# EAGLE board axiom_beta_imu_cso_v0.1_r1.1-default.265cd33e (EAGLE 7.7.0)
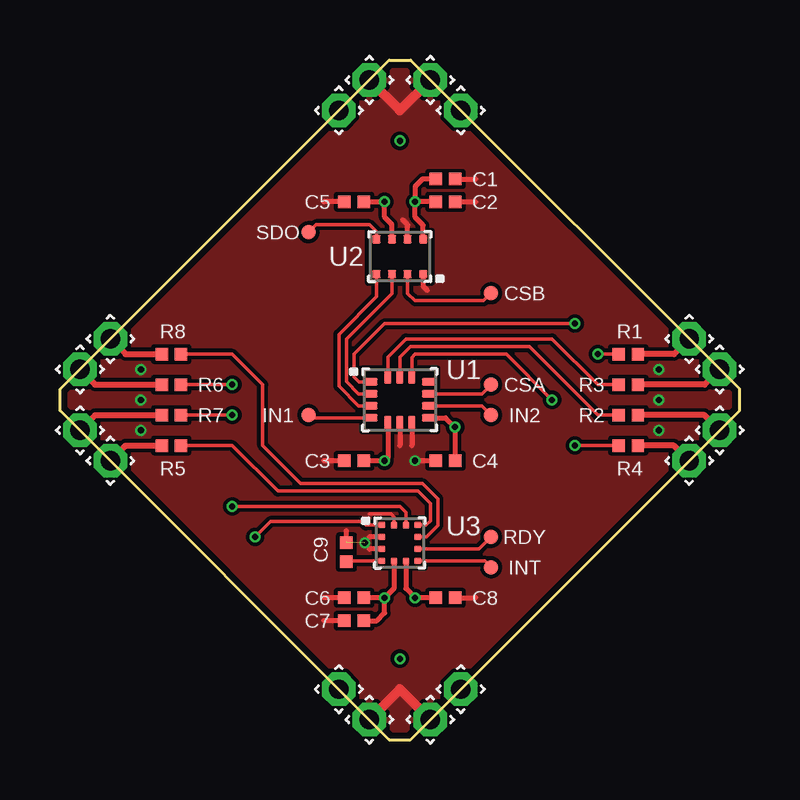
[diagram p0: board, top side]
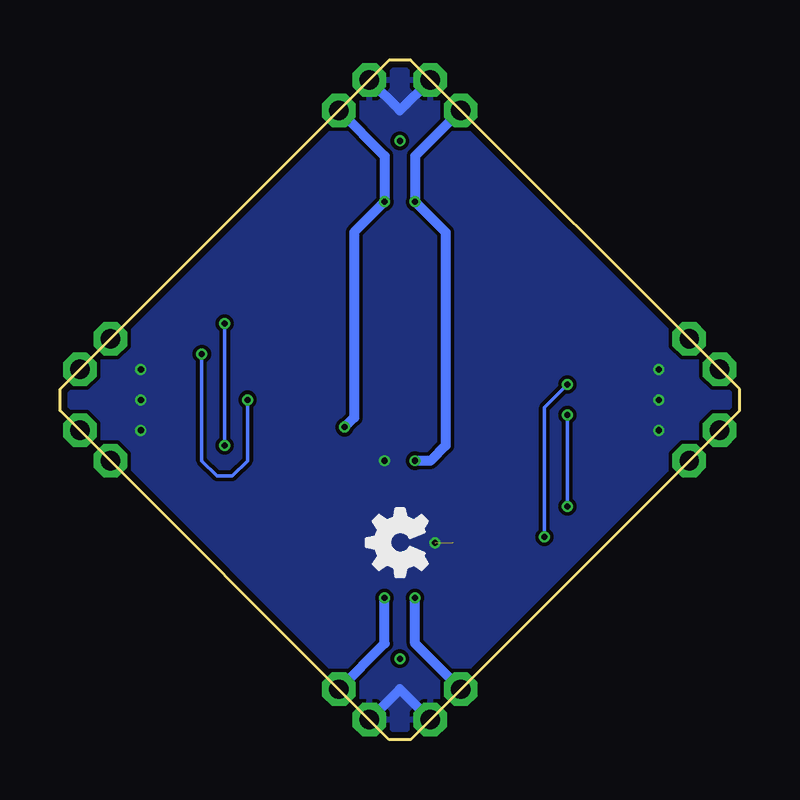
[diagram p1: board, bottom side, seen from below]

Size 28.34 x 28.34 mm. Coordinates in mm from the lower left corner, seen from the top.
Outline: 0,13.72 13.72,0 14.62,0 28.34,13.72 28.34,14.62 14.62,28.34 13.72,28.34 0,14.62 0,13.72
Copper layers (1*16): Top 0.035559375mm / dielectric 0.17018125mm / Bottom 0.035559375mm
Design rules "OSHPark-4layer-tuned *": minimum track width 5mil, minimum drill 10mil, track to track 6mil, track to pad 5mil, pad to pad 5mil, via to via 5mil, smd to smd 5mil, copper to edge 10mil, drill to drill 6mil, minimum pad ring 4mil, minimum via ring 4mil, stop-mask expansion 2mil, vias tented up to drill 100mil, thermal gap 6mil
Net classes: 0 default: width 0.152 mm, drill 0.254 mm; 1 power: width 0.152 mm, drill 0.254 mm

## Footprints (pad centres in the part's own frame; a part is rotated, then mirrored left to right if it is on the bottom)
0402-C = smd 0.52 x 0.52: 1 -0.4,0; 2 0.4,0
TP06R = smd 0.6 x 0.6: TP 0,0
LGA-14L = smd 0.55 x 0.3: 1 -1.2,0.75; 2 -1.2,0.25; 3 -1.2,-0.25; 4 -1.2,-0.75; 8 1.2,-0.75; 9 1.2,-0.25; 10 1.2,0.25; 11 1.2,0.75 | smd 0.3 x 0.55: 5 -0.5,-0.95; 6 0,-0.95; 7 0.5,-0.95; 12 0.5,0.95; 13 0,0.95; 14 -0.5,0.95
VLGA-8 = smd 0.35 x 0.35: 1 -0.975,0.725; 2 -0.325,0.725; 3 0.325,0.725; 4 0.975,0.725; 5 0.975,-0.725; 6 0.325,-0.725; 7 -0.325,-0.725; 8 -0.975,-0.725
VFLGA-12 = smd 0.3 x 0.28: 1 -0.75,0.75; 2 -0.75,0.25; 3 -0.75,-0.25; 4 -0.75,-0.75; 7 0.75,-0.75; 8 0.75,-0.25; 9 0.75,0.25; 10 0.75,0.75 | smd 0.28 x 0.3: 5 -0.25,-0.75; 6 0.25,-0.75; 11 0.25,0.75; 12 -0.25,0.75
1.4/0.8 = drill 0.8 pad 1.4 octagon: 1 0,0

## Placement (x,y rotation side)
C1  1u  [0402-C]  16.07,23.38 0 top
C2  100n  [0402-C]  16.07,22.42 0 top
C3  100n  [0402-C]  12.26,11.63 180 top
C4  100n  [0402-C]  16.07,11.63 180 top
C5  100n  [0402-C]  12.26,22.42 180 top
C6  100n  [0402-C]  12.26,5.91 180 top
C7  1u  [0402-C]  12.26,4.96 180 top
C8  100n  [0402-C]  16.07,5.91 0 top
C9  100n  [0402-C]  11.95,7.82 90 top
CSA  TPTP06R  [TP06R]  17.98,14.8 0 top
CSB  TPTP06R  [TP06R]  17.98,18.61 0 top
IN1  TPTP06R  [TP06R]  10.36,13.53 0 top
IN2  TPTP06R  [TP06R]  17.98,13.53 0 top
INT  TPTP06R  [TP06R]  17.98,7.18 0 top
LOGO1  OSHW_LOGO_FILLX0100-NT  [OSHW_FILLX100_NOTEXT]  13.03,6.8 90 bottom
R1  [0402-C]  23.69,16.07 180 top
R2  [0402-C]  23.69,13.53 180 top
R3  [0402-C]  23.69,14.8 180 top
R4  [0402-C]  23.69,12.26 180 top
R5  [0402-C]  4.64,12.26 0 top
R6  [0402-C]  4.64,14.8 0 top
R7  [0402-C]  4.64,13.53 0 top
R8  [0402-C]  4.64,16.07 0 top
RDY  TPTP06R  [TP06R]  17.98,8.45 0 top
SDO  TPTP06R  [TP06R]  10.36,21.15 0 top
U1  LSM6DS3H  [LGA-14L]  14.17,14.17 0 top
U2  DPS310  [VLGA-8]  14.17,20.14 180 top
U3  LIS3MDL  [VFLGA-12]  14.17,8.2 0 top
U$1  PINPAD2.00MM  [1.4/0.8]  12.9,27.5 45 top
U$2  PINPAD2.00MM  [1.4/0.8]  15.44,27.5 45 top
U$3  PINPAD2.00MM  [1.4/0.8]  11.63,26.23 45 top
U$4  PINPAD2.00MM  [1.4/0.8]  16.71,26.23 45 top
U$5  PINPAD2.00MM  [1.4/0.8]  2.1,16.71 45 top
U$6  PINPAD2.00MM  [1.4/0.8]  26.23,16.71 45 top
U$7  PINPAD2.00MM  [1.4/0.8]  0.83,15.44 45 top
U$8  PINPAD2.00MM  [1.4/0.8]  27.5,15.44 45 top
U$9  PINPAD2.00MM  [1.4/0.8]  0.83,12.9 45 top
U$10  PINPAD2.00MM  [1.4/0.8]  27.5,12.9 45 top
U$11  PINPAD2.00MM  [1.4/0.8]  2.1,11.63 225 top
U$12  PINPAD2.00MM  [1.4/0.8]  26.23,11.63 45 top
U$13  PINPAD2.00MM  [1.4/0.8]  11.63,2.1 45 top
U$14  PINPAD2.00MM  [1.4/0.8]  16.71,2.1 45 top
U$15  PINPAD2.00MM  [1.4/0.8]  12.9,0.83 45 top
U$16  PINPAD2.00MM  [1.4/0.8]  15.44,0.83 45 top

## Library data of the parts
C1-C9 R1-R8 = generic-rcl
CSA CSB IN1 IN2 INT RDY SDO = testpad
LOGO1 = ohw-logo
U1 = iNEMO
U2 = dps310
U3 = lis3mdl
U$1-U$16 = pinpad

## Nets
C_CK_E: R2.1 U$10.1
C_CK_W: R6.1 U$7.1
C_EN_E: R1.1 U$6.1
C_EN_W: R5.1 U$11.1
C_SI_E: R3.1 U$8.1
C_SI_W: R7.1 U$9.1
C_SO_E: R4.1 U$12.1
C_SO_W: R8.1 U$5.1
CSO_NE_V [power]: C1.1 C2.1 C4.1 U1.8 U2.8 U$4.1
CSO_NW_V: C3.1 C5.1 U1.5 U2.6 U$3.1
CSO_SE_V: C8.1 U3.6 U$14.1
CSO_SW_V [power]: C6.1 C7.1 U3.5 U$13.1
GND: C1.2 C2.2 C3.2 C4.2 C5.2 C6.2 C7.2 C8.2 C9.2 U1.6 U1.7 U2.1 U2.7 U3.2 U3.3 U3.12 U$1.1 U$2.1 U$15.1 U$16.1
N$5: U1.3 U2.4
N$6: U1.2 U2.3
N$7: IN2.TP U1.9
N$8: CSA.TP U1.10
N$9: IN1.TP U1.4
N$10: SDO.TP U2.5
N$11: CSB.TP U2.2
N$12: INT.TP U3.7
N$13: RDY.TP U3.8
N$18: C9.1 U3.4
N_CS: R1.2 U1.12
N_SDI: R3.2 U1.14
N_SDO: R4.2 U1.1
N_SPC: R2.2 U1.13
S_CS: R5.2 U3.10
S_SDI: R7.2 U3.11
S_SDO: R8.2 U3.9
S_SPC: R6.2 U3.1

## Tracks (layer width: path | path; a pad name or v marks a point on that pad's centre or on a via)
C_CK_E
  Top 0.254: U$10.1 26.87,13.53 R2.1
C_CK_W
  Top 0.254: U$7.1 1.47,14.8 R6.1
C_EN_E
  Top 0.254: U$6.1 25.6,16.07 R1.1
C_EN_W
  Top 0.254: U$11.1 2.74,12.26 R5.1
C_SI_E
  Top 0.254: U$8.1 26.87,14.8 R3.1
C_SI_W
  Top 0.254: U$9.1 1.47,13.53 R7.1
C_SO_E
  Top 0.254: U$12.1 25.6,12.26 R4.1
C_SO_W
  Top 0.254: U$5.1 2.74,16.07 R8.1
CSO_NE_V  (via drill 0.25)
  Top 0.203: U1.8 16.08,13.42 v16.47,13.03 C4.1 | C2.1 v14.8,22.42 | U2.8 15.14,21.45 14.8,21.79 v14.8,22.42 | C1.1 15.12,23.38 14.8,23.06 v14.8,22.42
  Bottom 0.406: U$4.1 14.8,24.33 v14.8,22.42 16.07,21.15 16.07,13.43 v16.47,13.03
CSO_NW_V  (via drill 0.25)
  Top 0.203: U1.5 13.67,11.76 v13.53,11.63 C3.1 | C5.1 v13.53,22.42 13.53,21.79 13.84,21.48 U2.6
  Bottom 0.406: U$3.1 13.53,24.33 v13.53,22.42 12.26,21.15 12.26,12.26 12.9,11.63 v13.53,11.63
CSO_SE_V  (via drill 0.25)
  Top 0.203: U3.6 14.42,6.3 v14.8,5.91 C8.1
  Bottom 0.406: U$14.1 14.8,4.01 v14.8,5.91
CSO_SW_V  (via drill 0.25)
  Top 0.203: U3.5 13.92,6.3 v13.53,5.91 | v13.53,5.91 C6.1 | C7.1 13.22,4.96 13.53,5.28 v13.53,5.91
  Bottom 0.406: U$13.1 13.53,4.01 v13.53,5.91
GND  (via drill 0.25)  (1 unrouted)
  Top 0.152: 12.9,9.42 13.79,9.42 13.92,9.29 U3.12
  Top 0.203: C9.2 11.95,8.71 | C3.2 10.99,11.63 | C4.2 v14.8,11.63 | C6.2 10.99,5.91 | C7.2 10.99,4.96 | C8.2 17.34,5.91 | C2.2 17.34,22.42 | C1.2 17.34,23.38 | C5.2 10.99,22.42 | U3.2 12.9,8.45 | U3.3 12.9,7.95 | U1.6 14.17,12.26 | U1.7 14.67,12.26 | U2.7 14.49,21.46 14.3,21.66 | U2.1 15.14,18.91 15.31,18.74
  Top 0.406: U$15.1 14.17,2.1 U$16.1 | U$2.1 14.17,26.23 U$1.1
  Bottom 0.406: U$16.1 14.17,2.1 U$15.1 | U$1.1 14.17,26.23 U$2.1
  other vias: 24.96,15.44 24.96,14.17 24.96,12.9 3.37,15.44 3.37,14.17 3.37,12.9 12.71,8.2
  pour Top: -0.44,14.17 14.17,28.77 28.77,14.17 14.17,-0.44
  pour Bottom: -0.44,14.17 14.17,28.77 28.77,14.17 14.17,-0.44
N$1
  cutout Top: 11.45,5.63 11.45,6.19 arc-90 11.58,6.32 12.95,6.32 arc-90 13.08,6.19 13.08,5.63 arc-90 12.95,5.51 11.58,5.51 arc-90
  cutout Top: 11.45,4.68 11.45,5.24 arc-90 11.58,5.37 12.95,5.37 arc-90 13.08,5.24 13.08,4.68 arc-90 12.95,4.55 11.58,4.55 arc-90
  cutout Top: 15.26,5.63 15.26,6.19 arc-90 15.39,6.32 16.76,6.32 arc-90 16.89,6.19 16.89,5.63 arc-90 16.76,5.51 15.39,5.51 arc-90
  cutout Top: 15.26,11.35 15.26,11.91 arc-90 15.39,12.04 16.76,12.04 arc-90 16.89,11.91 16.89,11.35 arc-90 16.76,11.22 15.39,11.22 arc-90
  cutout Top: 11.45,11.35 11.45,11.91 arc-90 11.58,12.04 12.95,12.04 arc-90 13.08,11.91 13.08,11.35 arc-90 12.95,11.22 11.58,11.22 arc-90
  cutout Top: 15.26,22.14 15.26,22.7 arc-90 15.39,22.83 16.76,22.83 arc-90 16.89,22.7 16.89,22.14 arc-90 16.76,22.02 15.39,22.02 arc-90
  cutout Top: 15.26,23.1 15.26,23.66 arc-90 15.39,23.78 16.76,23.78 arc-90 16.89,23.66 16.89,23.1 arc-90 16.76,22.97 15.39,22.97 arc-90
  cutout Top: 11.45,22.14 11.45,22.7 arc-90 11.58,22.83 12.95,22.83 arc-90 13.08,22.7 13.08,22.14 arc-90 12.95,22.02 11.58,22.02 arc-90
  cutout Top: 12.23,7.01 11.67,7.01 arc-90 11.54,7.13 11.54,8.5 arc-90 11.67,8.63 12.23,8.63 arc-90 12.35,8.5 12.35,7.13 arc-90
  cutout Top: 3.83,15.79 3.83,16.35 arc-90 3.96,16.48 5.33,16.48 arc-90 5.46,16.35 5.46,15.79 arc-90 5.33,15.67 3.96,15.67 arc-90
  cutout Top: 3.83,14.52 3.83,15.08 arc-90 3.96,15.21 5.33,15.21 arc-90 5.46,15.08 5.46,14.52 arc-90 5.33,14.4 3.96,14.4 arc-90
  cutout Top: 3.83,13.25 3.83,13.81 arc-90 3.96,13.94 5.33,13.94 arc-90 5.46,13.81 5.46,13.25 arc-90 5.33,13.13 3.96,13.13 arc-90
  cutout Top: 3.83,11.98 3.83,12.54 arc-90 3.96,12.67 5.33,12.67 arc-90 5.46,12.54 5.46,11.98 arc-90 5.33,11.86 3.96,11.86 arc-90
  cutout Top: 22.88,11.98 22.88,12.54 arc-90 23.01,12.67 24.38,12.67 arc-90 24.51,12.54 24.51,11.98 arc-90 24.38,11.86 23.01,11.86 arc-90
  cutout Top: 22.88,13.25 22.88,13.81 arc-90 23.01,13.94 24.38,13.94 arc-90 24.51,13.81 24.51,13.25 arc-90 24.38,13.13 23.01,13.13 arc-90
  cutout Top: 22.88,14.52 22.88,15.08 arc-90 23.01,15.21 24.38,15.21 arc-90 24.51,15.08 24.51,14.52 arc-90 24.38,14.4 23.01,14.4 arc-90
  cutout Top: 22.88,15.79 22.88,16.35 arc-90 23.01,16.48 24.38,16.48 arc-90 24.51,16.35 24.51,15.79 arc-90 24.38,15.67 23.01,15.67 arc-90
  cutout Top: 15.83,15.46 15.83,12.87 arc-90 15.71,12.75 12.63,12.75 arc-90 12.5,12.87 12.5,15.46 arc-90 12.63,15.59 15.71,15.59 arc-90
  cutout Top: 12.75,19.06 12.75,21.2 arc-90 12.87,21.33 15.46,21.33 arc-90 15.59,21.2 15.59,19.06 arc-90 15.46,18.93 12.87,18.93 arc-90
  cutout Top: 13.15,9.34 15.18,9.34 arc-90 15.31,9.22 15.31,7.18 arc-90 15.18,7.06 13.15,7.06 arc-90 13.03,7.18 13.03,9.22 arc-90
N$2
  cutout Top: 9.9,13.53 arc-180 10.82,13.53 arc-180
  cutout Top: 17.52,13.53 arc-180 18.44,13.53 arc-180
  cutout Top: 17.52,14.8 arc-180 18.44,14.8 arc-180
  cutout Top: 17.52,18.61 arc-180 18.44,18.61 arc-180
  cutout Top: 9.9,21.15 arc-180 10.82,21.15 arc-180
  cutout Top: 17.52,8.45 arc-180 18.44,8.45 arc-180
  cutout Top: 17.52,7.18 arc-180 18.44,7.18 arc-180
N$3  (via drill 0.25)
  other vias: 14.17,24.96
N$4  (via drill 0.25)
  other vias: 14.17,3.37
N$5
  Top 0.152: U1.3 12.45,13.92 11.63,14.74 11.63,16.9 13.19,18.46 U2.4
N$6
  Top 0.152: U1.2 12.46,14.42 11.95,14.93 11.95,16.71 13.84,18.61 U2.3
N$7
  Top 0.152: U1.9 17.59,13.92 IN2.TP
N$8
  Top 0.152: U1.10 17.59,14.42 CSA.TP
N$9
  Top 0.152: U1.4 10.47,13.42 IN1.TP
N$10
  Top 0.152: U2.5 13.19,21.18 12.9,21.47 10.68,21.47 SDO.TP
N$11
  Top 0.152: U2.2 14.49,18.61 14.8,18.3 17.66,18.3 CSB.TP
N$12
  Top 0.152: U3.7 17.71,7.45 INT.TP
N$13
  Top 0.152: U3.8 17.47,7.95 RDY.TP
N$18
  Top 0.152: U3.4 11.98,7.45 C9.1
N_CS  (via drill 0.25)
  Top 0.152: U1.12 14.67,15.94 14.8,16.07 18.61,16.07 v20.52,14.17 | R1.2 v22.42,16.07
  Bottom 0.152: v20.52,14.17 20.52,11.63 21.15,10.99 21.79,10.99 22.42,11.63 v22.42,16.07
N_SDI
  Top 0.152: U1.14 13.67,15.95 14.42,16.71 20.52,16.71 22.42,14.8 R3.2
N_SDO  (via drill 0.25)
  Top 0.152: U1.1 12.47,14.92 12.26,15.12 12.26,16.07 13.53,17.34 v21.47,17.34 | R4.2 v21.47,12.26
  Bottom 0.152: v21.47,17.34 v21.47,12.26
N_SPC
  Top 0.152: U1.13 14.17,15.95 14.61,16.39 19.57,16.39 22.42,13.53 R2.2
S_CS
  Top 0.152: U3.10 15.27,8.95 15.44,9.12 15.44,9.85 14.93,10.36 9.09,10.36 7.18,12.26 R5.2
S_SDI  (via drill 0.25)
  Top 0.152: U3.11 14.42,9.47 14.17,9.72 v7.18,9.72 | R7.2 v7.18,13.53
  Bottom 0.152: v7.18,9.72 v7.18,13.53
S_SDO
  Top 0.152: U3.9 15.28,8.45 15.76,8.93 15.76,10.04 15.12,10.68 10.04,10.68 8.45,12.26 8.45,14.8 7.18,16.07 R8.2
S_SPC  (via drill 0.25)
  Top 0.152: U3.1 12.75,8.95 12.58,9.09 8.77,9.09 v8.14,8.45 | R6.2 v7.18,14.8
  Bottom 0.152: v8.14,8.45 8.14,13.85 v7.18,14.8

## Text on the board
_tSilk: V0.1 / R1.1
_bSilk: Copyright (C) 2017 Herbert Pötzl / Licensed under CERN OHL v.1.2 | LSM6DS3 DPS310 LIS3MDL | Axiom Beta IMU CSO